# Altium PCB Omid Mazarei.PcbDoc (part 2 of 3)
Units mm, origin at the board's own origin, x right, y up, seen from the top; angles counter-clockwise.
Board outline 297 x 210 mm, 2 copper layers (Top Layer, Bottom Layer); 469 components, 0 nets, 938 pads, 2 vias.
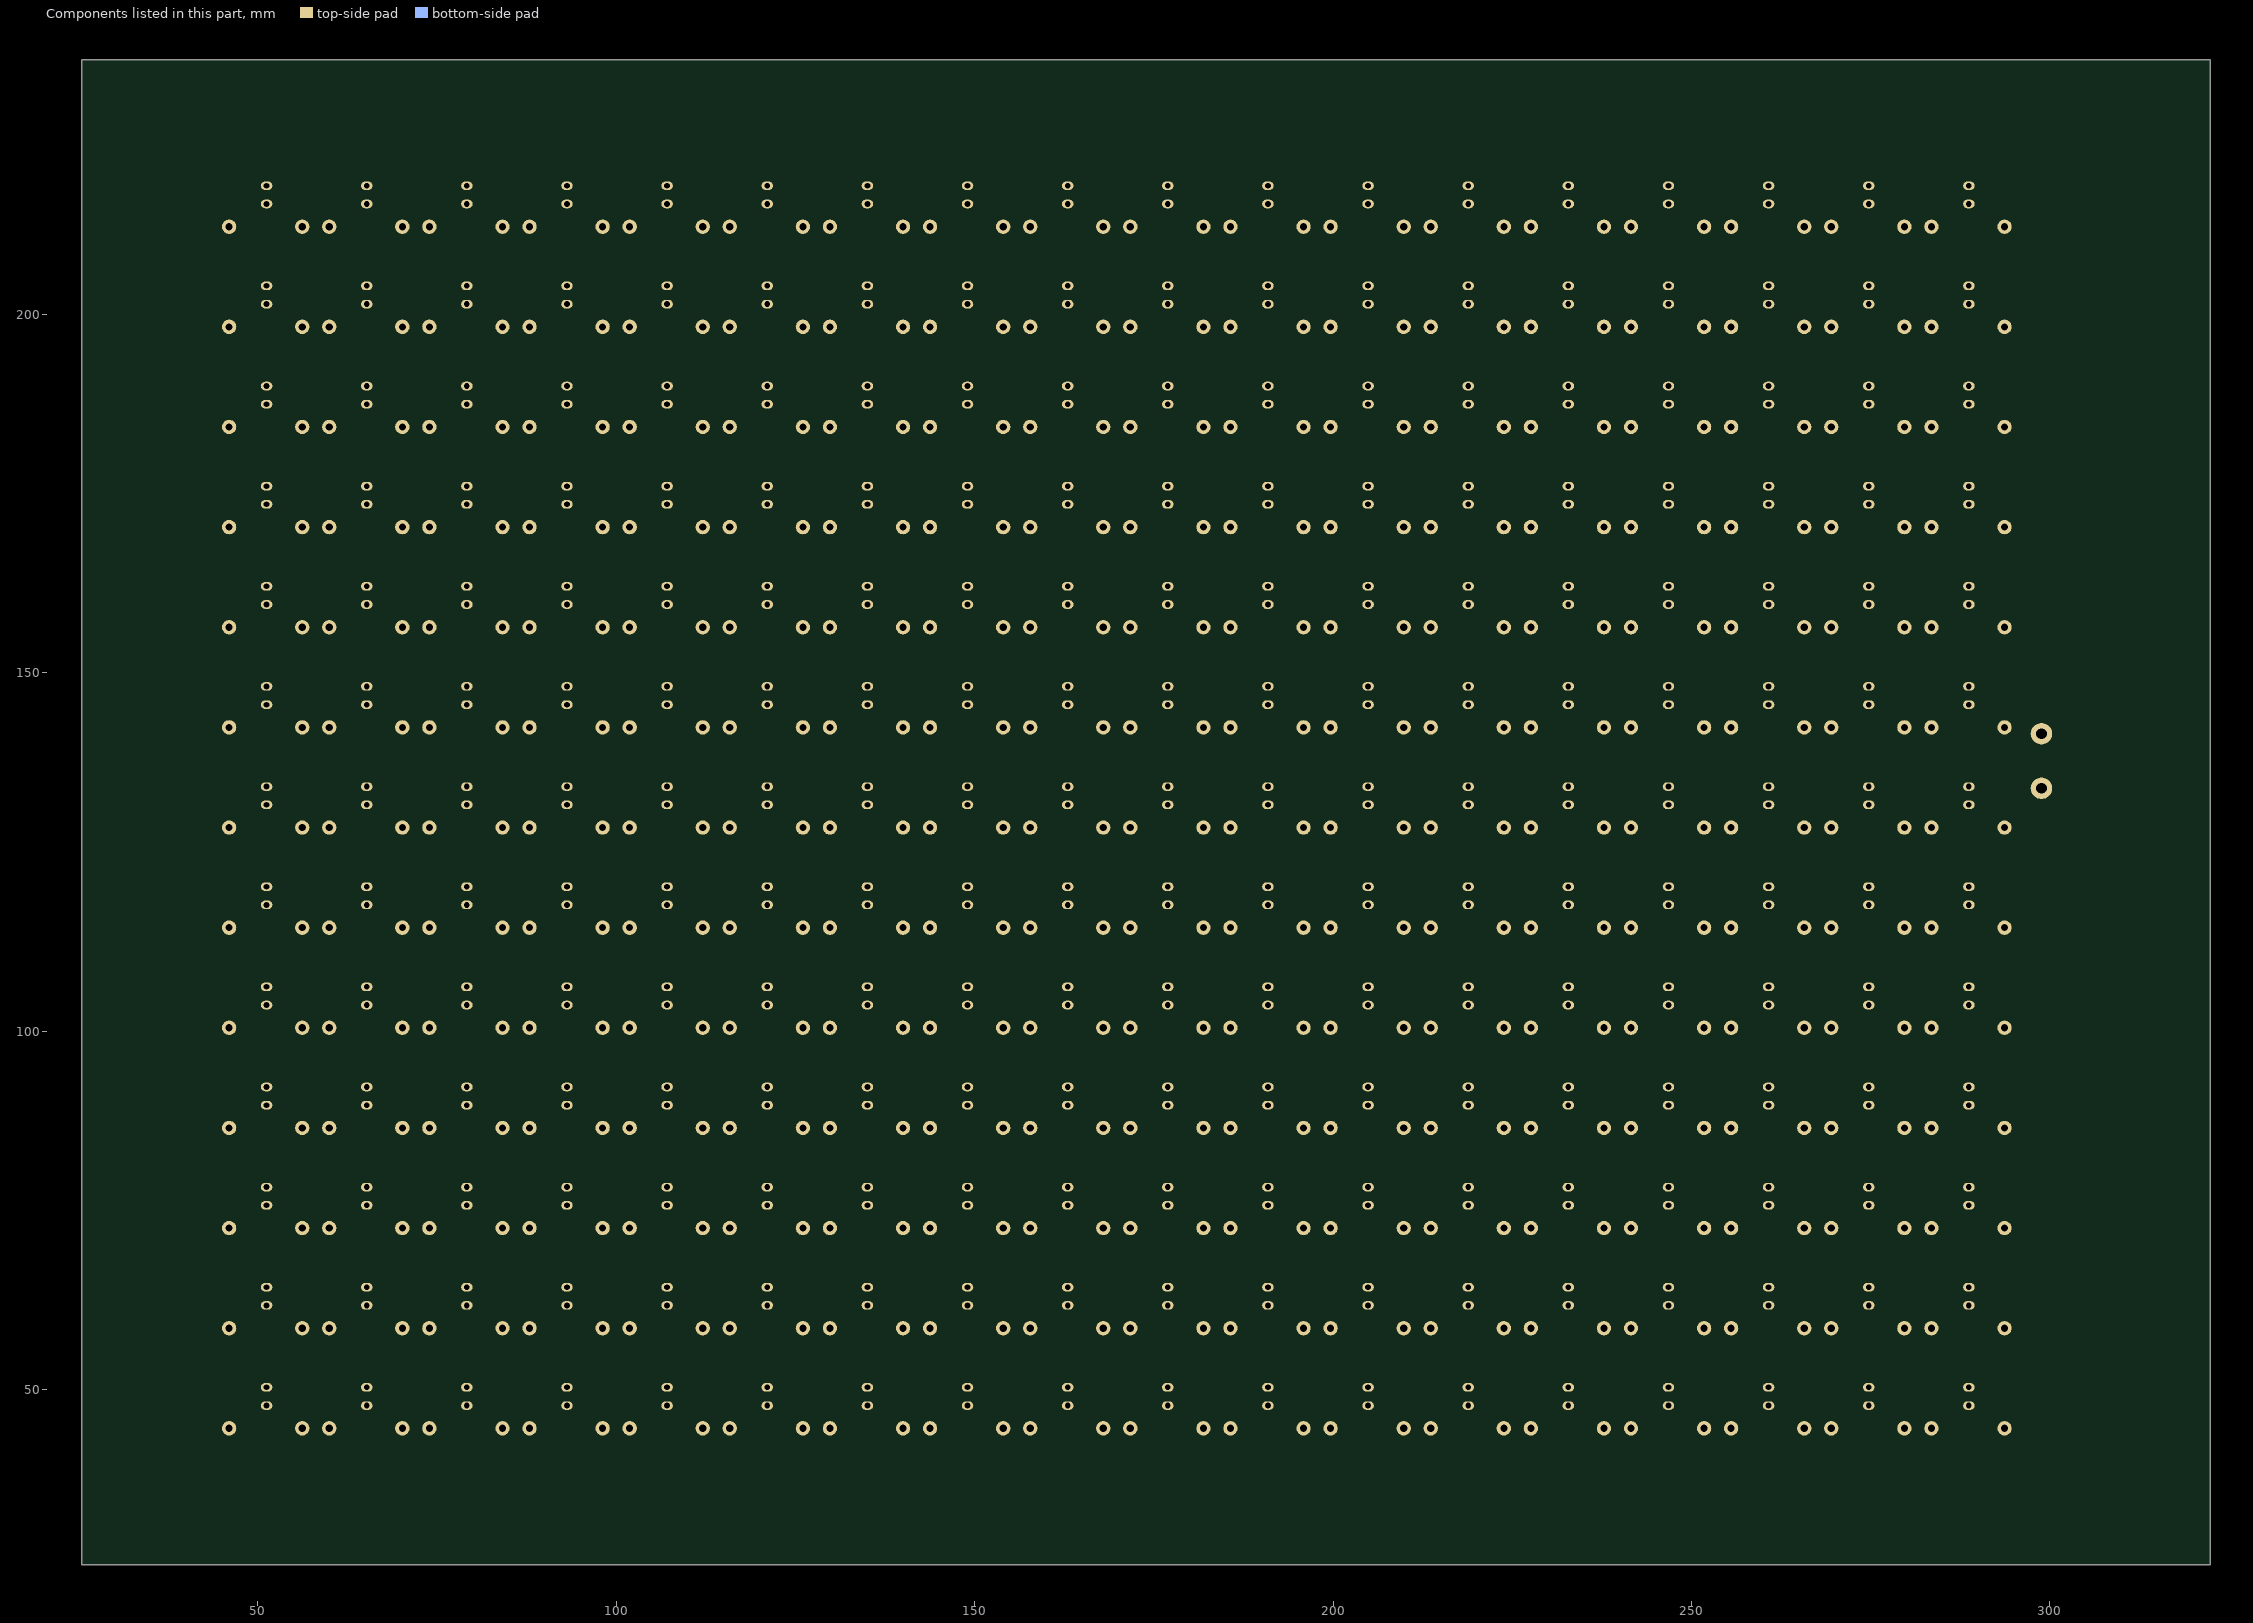
[diagram p2: the components of this part, seen from the top]

## Via types
v1: diameter 2, hole 1, Top Layer to Bottom Layer, 2 vias

## Nets (pads, with @x,y where several pads share a name; then routed paths per layer and width w, separated by ;. In a path a pad name is that pad's centre, name@x,y a point inside that pad or via, vN(x,y) a via of type N, cw(c..) or ccw(c..) an arc to the next point about the centre after c; other vN are vias at no path point)
pads on no net: Designator11_1_2.1 Designator11_1_2.2 Designator11_1_3.1 Designator11_1_3.2 Designator11_1_4.1 Designator11_1_4.2 Designator11_1_5.1 Designator11_1_5.2 Designator11_1_6.1 Designator11_1_6.2 Designator11_1_7.1 Designator11_1_7.2 Designator11_1_8.1 Designator11_1_8.2 Designator11_1_9.1 Designator11_1_9.2 Designator11_1_10.1 Designator11_1_10.2 Designator11_1_11.1 Designator11_1_11.2 Designator11_1_12.1 Designator11_1_12.2 Designator11_1_13.1 Designator11_1_13.2 Designator11_1_14.1 Designator11_1_14.2 Designator11_2_2.1 Designator11_2_2.2 Designator11_2_3.1 Designator11_2_3.2 Designator11_2_4.1 Designator11_2_4.2 Designator11_2_5.1 Designator11_2_5.2 Designator11_2_6.1 Designator11_2_6.2 Designator11_2_7.1 Designator11_2_7.2 Designator11_2_8.1 Designator11_2_8.2 Designator11_2_9.1 Designator11_2_9.2 Designator11_2_10.1 Designator11_2_10.2 Designator11_2_11.1 Designator11_2_11.2 Designator11_2_12.1 Designator11_2_12.2 Designator11_2_13.1 Designator11_2_13.2 Designator11_2_14.1 Designator11_2_14.2 Designator11_3_2.1 Designator11_3_2.2 Designator11_3_3.1 Designator11_3_3.2 Designator11_3_4.1 Designator11_3_4.2 Designator11_3_5.1 Designator11_3_5.2 Designator11_3_6.1 Designator11_3_6.2 Designator11_3_7.1 Designator11_3_7.2 Designator11_3_8.1 Designator11_3_8.2 Designator11_3_9.1 Designator11_3_9.2 Designator11_3_10.1 Designator11_3_10.2 Designator11_3_11.1 Designator11_3_11.2 Designator11_3_12.1 Designator11_3_12.2 Designator11_3_13.1 Designator11_3_13.2 Designator11_3_14.1 Designator11_3_14.2 Designator11_4_2.1 Designator11_4_2.2 Designator11_4_3.1 Designator11_4_3.2 Designator11_4_4.1 Designator11_4_4.2 Designator11_4_5.1 Designator11_4_5.2 Designator11_4_6.1 Designator11_4_6.2 Designator11_4_7.1 Designator11_4_7.2 Designator11_4_8.1 Designator11_4_8.2 Designator11_4_9.1 Designator11_4_9.2 Designator11_4_10.1 Designator11_4_10.2 Designator11_4_11.1 Designator11_4_11.2 Designator11_4_12.1 Designator11_4_12.2 Designator11_4_13.1 Designator11_4_13.2 Designator11_4_14.1 Designator11_4_14.2 Designator11_5_2.1 Designator11_5_2.2 Designator11_5_3.1 Designator11_5_3.2 Designator11_5_4.1 Designator11_5_4.2 Designator11_5_5.1 Designator11_5_5.2 Designator11_5_6.1 Designator11_5_6.2 Designator11_5_7.1 Designator11_5_7.2 Designator11_5_8.1 Designator11_5_8.2 Designator11_5_9.1 Designator11_5_9.2 Designator11_5_10.1 Designator11_5_10.2 Designator11_5_11.1 Designator11_5_11.2 Designator11_5_12.1 Designator11_5_12.2 Designator11_5_13.1 Designator11_5_13.2 Designator11_5_14.1 Designator11_5_14.2 Designator11_6_2.1 Designator11_6_2.2 Designator11_6_3.1 Designator11_6_3.2 Designator11_6_4.1 Designator11_6_4.2 Designator11_6_5.1 Designator11_6_5.2 Designator11_6_6.1 Designator11_6_6.2 Designator11_6_7.1 Designator11_6_7.2 Designator11_6_8.1 Designator11_6_8.2 Designator11_6_9.1 Designator11_6_9.2 Designator11_6_10.1 Designator11_6_10.2 Designator11_6_11.1 Designator11_6_11.2 Designator11_6_12.1 Designator11_6_12.2 Designator11_6_13.1 Designator11_6_13.2 Designator11_6_14.1 Designator11_6_14.2 Designator11_7_2.1 Designator11_7_2.2 Designator11_7_3.1 Designator11_7_3.2 Designator11_7_4.1 Designator11_7_4.2 Designator11_7_5.1 Designator11_7_5.2 Designator11_7_6.1 Designator11_7_6.2 Designator11_7_7.1 Designator11_7_7.2 Designator11_7_8.1 Designator11_7_8.2 Designator11_7_9.1 Designator11_7_9.2 Designator11_7_10.1 Designator11_7_10.2 Designator11_7_11.1 Designator11_7_11.2 Designator11_7_12.1 Designator11_7_12.2 Designator11_7_13.1 Designator11_7_13.2 Designator11_7_14.1 Designator11_7_14.2 Designator11_8_2.1 Designator11_8_2.2 Designator11_8_3.1 Designator11_8_3.2 Designator11_8_4.1 Designator11_8_4.2 Designator11_8_5.1 Designator11_8_5.2 Designator11_8_6.1 Designator11_8_6.2 Designator11_8_7.1 Designator11_8_7.2 Designator11_8_8.1 Designator11_8_8.2 Designator11_8_9.1 Designator11_8_9.2 Designator11_8_10.1 Designator11_8_10.2 Designator11_8_11.1 Designator11_8_11.2 Designator11_8_12.1 Designator11_8_12.2 Designator11_8_13.1 Designator11_8_13.2 Designator11_8_14.1 Designator11_8_14.2 Designator11_9_2.1 Designator11_9_2.2 Designator11_9_3.1 Designator11_9_3.2 Designator11_9_4.1 Designator11_9_4.2 Designator11_9_5.1 Designator11_9_5.2 Designator11_9_6.1 Designator11_9_6.2 Designator11_9_7.1 Designator11_9_7.2 Designator11_9_8.1 Designator11_9_8.2 Designator11_9_9.1 Designator11_9_9.2 Designator11_9_10.1 Designator11_9_10.2 Designator11_9_11.1 Designator11_9_11.2 Designator11_9_12.1 Designator11_9_12.2 Designator11_9_13.1 Designator11_9_13.2 Designator11_9_14.1 Designator11_9_14.2 Designator11_10_2.1 Designator11_10_2.2 Designator11_10_3.1 Designator11_10_3.2 Designator11_10_4.1 Designator11_10_4.2 Designator11_10_5.1 Designator11_10_5.2 Designator11_10_6.1 Designator11_10_6.2 Designator11_10_7.1 Designator11_10_7.2 Designator11_10_8.1 Designator11_10_8.2 Designator11_10_9.1 Designator11_10_9.2 Designator11_10_10.1 Designator11_10_10.2 Designator11_10_11.1 Designator11_10_11.2 Designator11_10_12.1 Designator11_10_12.2 Designator11_10_13.1 Designator11_10_13.2 Designator11_10_14.1 Designator11_10_14.2 Designator11_11_2.1 Designator11_11_2.2 Designator11_11_3.1 Designator11_11_3.2 Designator11_11_4.1 Designator11_11_4.2 Designator11_11_5.1 Designator11_11_5.2 Designator11_11_6.1 Designator11_11_6.2 Designator11_11_7.1 Designator11_11_7.2 Designator11_11_8.1 Designator11_11_8.2 Designator11_11_9.1 Designator11_11_9.2 Designator11_11_10.1 Designator11_11_10.2 Designator11_11_11.1 Designator11_11_11.2 Designator11_11_12.1 Designator11_11_12.2 Designator11_11_13.1 Designator11_11_13.2 Designator11_11_14.1 Designator11_11_14.2 Designator11_12_2.1 Designator11_12_2.2 Designator11_12_3.1 Designator11_12_3.2 Designator11_12_4.1 Designator11_12_4.2 Designator11_12_5.1 Designator11_12_5.2 Designator11_12_6.1 Designator11_12_6.2 Designator11_12_7.1 Designator11_12_7.2 Designator11_12_8.1 Designator11_12_8.2 Designator11_12_9.1 Designator11_12_9.2 Designator11_12_10.1 Designator11_12_10.2 Designator11_12_11.1 Designator11_12_11.2 Designator11_12_12.1 Designator11_12_12.2 Designator11_12_13.1 Designator11_12_13.2 Designator11_12_14.1 Designator11_12_14.2 Designator11_13_2.1 Designator11_13_2.2 Designator11_13_3.1 Designator11_13_3.2 Designator11_13_4.1 Designator11_13_4.2 Designator11_13_5.1 Designator11_13_5.2 Designator11_13_6.1 Designator11_13_6.2 Designator11_13_7.1 Designator11_13_7.2 Designator11_13_8.1 Designator11_13_8.2 Designator11_13_9.1 Designator11_13_9.2 Designator11_13_10.1 Designator11_13_10.2 Designator11_13_11.1 Designator11_13_11.2 Designator11_13_12.1 Designator11_13_12.2 Designator11_13_13.1 Designator11_13_13.2 Designator11_13_14.1 Designator11_13_14.2 Designator11_14_2.1 Designator11_14_2.2 Designator11_14_3.1 Designator11_14_3.2 Designator11_14_4.1 Designator11_14_4.2 Designator11_14_5.1 Designator11_14_5.2 Designator11_14_6.1 Designator11_14_6.2 Designator11_14_7.1 Designator11_14_7.2 Designator11_14_8.1 Designator11_14_8.2 Designator11_14_9.1 Designator11_14_9.2 Designator11_14_10.1 Designator11_14_10.2 Designator11_14_11.1 Designator11_14_11.2 Designator11_14_12.1 Designator11_14_12.2 Designator11_14_13.1 Designator11_14_13.2 Designator11_14_14.1 Designator11_14_14.2 Designator11_15_2.1 Designator11_15_2.2 Designator11_15_3.1 Designator11_15_3.2 Designator11_15_4.1 Designator11_15_4.2 Designator11_15_5.1 Designator11_15_5.2 Designator11_15_6.1 Designator11_15_6.2 Designator11_15_7.1 Designator11_15_7.2 Designator11_15_8.1 Designator11_15_8.2 Designator11_15_9.1 Designator11_15_9.2 Designator11_15_10.1 Designator11_15_10.2 Designator11_15_11.1 Designator11_15_11.2 Designator11_15_12.1 Designator11_15_12.2 Designator11_15_13.1 Designator11_15_13.2 Designator11_15_14.1 Designator11_15_14.2 Designator11_16_2.1 Designator11_16_2.2 Designator11_16_3.1 Designator11_16_3.2 Designator11_16_4.1 Designator11_16_4.2 Designator11_16_5.1 Designator11_16_5.2 Designator11_16_6.1 Designator11_16_6.2 Designator11_16_7.1 Designator11_16_7.2 Designator11_16_8.1 Designator11_16_8.2 Designator11_16_9.1 Designator11_16_9.2 Designator11_16_10.1 Designator11_16_10.2 Designator11_16_11.1 Designator11_16_11.2 Designator11_16_12.1 Designator11_16_12.2 Designator11_16_13.1 Designator11_16_13.2 Designator11_16_14.1 Designator11_16_14.2 Designator11_17_2.1 Designator11_17_2.2 Designator11_17_3.1 Designator11_17_3.2 Designator11_17_4.1 Designator11_17_4.2 Designator11_17_5.1 Designator11_17_5.2 Designator11_17_6.1 Designator11_17_6.2 Designator11_17_7.1 Designator11_17_7.2 Designator11_17_8.1 Designator11_17_8.2 Designator11_17_9.1 Designator11_17_9.2 Designator11_17_10.1 Designator11_17_10.2 Designator11_17_11.1 Designator11_17_11.2 Designator11_17_12.1 Designator11_17_12.2 Designator11_17_13.1 Designator11_17_13.2 Designator11_17_14.1 Designator11_17_14.2 Designator11_18_2.1 Designator11_18_2.2 Designator11_18_3.1 Designator11_18_3.2 Designator11_18_4.1 Designator11_18_4.2 Designator11_18_5.1 Designator11_18_5.2 Designator11_18_6.1 Designator11_18_6.2 Designator11_18_7.1 Designator11_18_7.2 Designator11_18_8.1 Designator11_18_8.2 Designator11_18_9.1 Designator11_18_9.2 Designator11_18_10.1 Designator11_18_10.2 Designator11_18_11.1 Designator11_18_11.2 Designator11_18_12.1 Designator11_18_12.2 Designator11_18_13.1 Designator11_18_13.2 Designator11_18_14.1 Designator11_18_14.2 Designator12_1_2.1 Designator12_1_2.2 Designator12_1_3.1 Designator12_1_3.2 Designator12_1_4.1 Designator12_1_4.2 Designator12_1_5.1 Designator12_1_5.2 Designator12_1_6.1 Designator12_1_6.2 Designator12_1_7.1 Designator12_1_7.2 Designator12_1_8.1 Designator12_1_8.2 Designator12_1_9.1 Designator12_1_9.2 Designator12_1_10.1 Designator12_1_10.2 Designator12_1_11.1 Designator12_1_11.2 Designator12_1_12.1 Designator12_1_12.2 Designator12_1_13.1 Designator12_1_13.2 Designator12_1_14.1 Designator12_1_14.2 Designator12_2_2.1 Designator12_2_2.2 Designator12_2_3.1 Designator12_2_3.2 Designator12_2_4.1 Designator12_2_4.2 Designator12_2_5.1 Designator12_2_5.2 Designator12_2_6.1 Designator12_2_6.2 Designator12_2_7.1 Designator12_2_7.2 Designator12_2_8.1 Designator12_2_8.2 Designator12_2_9.1 Designator12_2_9.2 Designator12_2_10.1 Designator12_2_10.2 Designator12_2_11.1 Designator12_2_11.2 Designator12_2_12.1 Designator12_2_12.2 Designator12_2_13.1 Designator12_2_13.2 Designator12_2_14.1 Designator12_2_14.2 Designator12_3_2.1 Designator12_3_2.2 Designator12_3_3.1 Designator12_3_3.2 Designator12_3_4.1 Designator12_3_4.2 Designator12_3_5.1 Designator12_3_5.2 Designator12_3_6.1 Designator12_3_6.2 Designator12_3_7.1 Designator12_3_7.2 Designator12_3_8.1 Designator12_3_8.2 Designator12_3_9.1 Designator12_3_9.2 Designator12_3_10.1 Designator12_3_10.2 Designator12_3_11.1 Designator12_3_11.2 Designator12_3_12.1 Designator12_3_12.2 Designator12_3_13.1 Designator12_3_13.2 Designator12_3_14.1 Designator12_3_14.2 Designator12_4_2.1 Designator12_4_2.2 Designator12_4_3.1 Designator12_4_3.2 Designator12_4_4.1 Designator12_4_4.2 Designator12_4_5.1 Designator12_4_5.2 Designator12_4_6.1 Designator12_4_6.2 Designator12_4_7.1 Designator12_4_7.2 Designator12_4_8.1 Designator12_4_8.2 Designator12_4_9.1 Designator12_4_9.2 Designator12_4_10.1 Designator12_4_10.2 Designator12_4_11.1 Designator12_4_11.2 Designator12_4_12.1 Designator12_4_12.2 Designator12_4_13.1 Designator12_4_13.2 Designator12_4_14.1 Designator12_4_14.2 Designator12_5_2.1 Designator12_5_2.2 Designator12_5_3.1 Designator12_5_3.2 Designator12_5_4.1 Designator12_5_4.2 Designator12_5_5.1 Designator12_5_5.2 Designator12_5_6.1 Designator12_5_6.2 Designator12_5_7.1 Designator12_5_7.2 Designator12_5_8.1 Designator12_5_8.2 Designator12_5_9.1 Designator12_5_9.2 Designator12_5_10.1 Designator12_5_10.2 Designator12_5_11.1 Designator12_5_11.2 Designator12_5_12.1 Designator12_5_12.2 Designator12_5_13.1 Designator12_5_13.2 Designator12_5_14.1 Designator12_5_14.2 Designator12_6_2.1 Designator12_6_2.2 Designator12_6_3.1 Designator12_6_3.2 Designator12_6_4.1 Designator12_6_4.2 Designator12_6_5.1 Designator12_6_5.2 Designator12_6_6.1 Designator12_6_6.2 Designator12_6_7.1 Designator12_6_7.2 Designator12_6_8.1 Designator12_6_8.2 Designator12_6_9.1 Designator12_6_9.2 Designator12_6_10.1 Designator12_6_10.2 Designator12_6_11.1 Designator12_6_11.2 Designator12_6_12.1 Designator12_6_12.2 Designator12_6_13.1 Designator12_6_13.2 Designator12_6_14.1 Designator12_6_14.2 Designator12_7_2.1 Designator12_7_2.2 Designator12_7_3.1 Designator12_7_3.2 Designator12_7_4.1 Designator12_7_4.2 Designator12_7_5.1 Designator12_7_5.2 Designator12_7_6.1 Designator12_7_6.2 Designator12_7_7.1 Designator12_7_7.2 Designator12_7_8.1 Designator12_7_8.2 Designator12_7_9.1 Designator12_7_9.2 Designator12_7_10.1 Designator12_7_10.2 Designator12_7_11.1 Designator12_7_11.2 Designator12_7_12.1 Designator12_7_12.2 Designator12_7_13.1 Designator12_7_13.2 Designator12_7_14.1 Designator12_7_14.2 Designator12_8_2.1 Designator12_8_2.2 Designator12_8_3.1 Designator12_8_3.2 Designator12_8_4.1 Designator12_8_4.2 Designator12_8_5.1 Designator12_8_5.2 Designator12_8_6.1 Designator12_8_6.2 Designator12_8_7.1 Designator12_8_7.2 Designator12_8_8.1 Designator12_8_8.2 Designator12_8_9.1 Designator12_8_9.2 Designator12_8_10.1 Designator12_8_10.2 Designator12_8_11.1 Designator12_8_11.2 Designator12_8_12.1 Designator12_8_12.2 Designator12_8_13.1 Designator12_8_13.2 Designator12_8_14.1 Designator12_8_14.2 Designator12_9_2.1 Designator12_9_2.2 Designator12_9_3.1 Designator12_9_3.2 Designator12_9_4.1 Designator12_9_4.2 Designator12_9_5.1 Designator12_9_5.2 Designator12_9_6.1 Designator12_9_6.2 Designator12_9_7.1 Designator12_9_7.2 Designator12_9_8.1 Designator12_9_8.2 Designator12_9_9.1 Designator12_9_9.2 Designator12_9_10.1 Designator12_9_10.2 Designator12_9_11.1 Designator12_9_11.2 Designator12_9_12.1 Designator12_9_12.2 Designator12_9_13.1 Designator12_9_13.2 Designator12_9_14.1 Designator12_9_14.2 Designator12_10_2.1 Designator12_10_2.2 Designator12_10_3.1 Designator12_10_3.2 Designator12_10_4.1 Designator12_10_4.2 Designator12_10_5.1 Designator12_10_5.2 Designator12_10_6.1 Designator12_10_6.2 Designator12_10_7.1 Designator12_10_7.2 Designator12_10_8.1 Designator12_10_8.2 Designator12_10_9.1 Designator12_10_9.2 Designator12_10_10.1 Designator12_10_10.2 Designator12_10_11.1 Designator12_10_11.2 Designator12_10_12.1 Designator12_10_12.2 Designator12_10_13.1 Designator12_10_13.2 Designator12_10_14.1 Designator12_10_14.2 Designator12_11_2.1 Designator12_11_2.2 Designator12_11_3.1 Designator12_11_3.2 Designator12_11_4.1 Designator12_11_4.2 Designator12_11_5.1 Designator12_11_5.2 Designator12_11_6.1 Designator12_11_6.2 Designator12_11_7.1 Designator12_11_7.2 Designator12_11_8.1 Designator12_11_8.2 Designator12_11_9.1 Designator12_11_9.2 Designator12_11_10.1 Designator12_11_10.2 Designator12_11_11.1 Designator12_11_11.2 Designator12_11_12.1 Designator12_11_12.2 Designator12_11_13.1 Designator12_11_13.2 Designator12_11_14.1 Designator12_11_14.2 Designator12_12_2.1 Designator12_12_2.2 Designator12_12_3.1 Designator12_12_3.2 Designator12_12_4.1 Designator12_12_4.2 Designator12_12_5.1 Designator12_12_5.2 Designator12_12_6.1 Designator12_12_6.2 Designator12_12_7.1 Designator12_12_7.2 Designator12_12_8.1 Designator12_12_8.2 Designator12_12_9.1 Designator12_12_9.2 Designator12_12_10.1 Designator12_12_10.2 Designator12_12_11.1 Designator12_12_11.2 Designator12_12_12.1 Designator12_12_12.2 Designator12_12_13.1 Designator12_12_13.2 Designator12_12_14.1 Designator12_12_14.2 Designator12_13_2.1 Designator12_13_2.2 Designator12_13_3.1 Designator12_13_3.2 Designator12_13_4.1 Designator12_13_4.2 Designator12_13_5.1 Designator12_13_5.2 Designator12_13_6.1 Designator12_13_6.2 Designator12_13_7.1 Designator12_13_7.2 Designator12_13_8.1 Designator12_13_8.2 Designator12_13_9.1 Designator12_13_9.2 Designator12_13_10.1 Designator12_13_10.2 Designator12_13_11.1 Designator12_13_11.2 Designator12_13_12.1 Designator12_13_12.2 Designator12_13_13.1 Designator12_13_13.2 Designator12_13_14.1 Designator12_13_14.2 Designator12_14_2.1 Designator12_14_2.2 Designator12_14_3.1 Designator12_14_3.2 Designator12_14_4.1 Designator12_14_4.2 Designator12_14_5.1 Designator12_14_5.2 Designator12_14_6.1 Designator12_14_6.2 Designator12_14_7.1 Designator12_14_7.2 Designator12_14_8.1 Designator12_14_8.2 Designator12_14_9.1 Designator12_14_9.2 Designator12_14_10.1 Designator12_14_10.2 Designator12_14_11.1 Designator12_14_11.2 Designator12_14_12.1 Designator12_14_12.2 Designator12_14_13.1 Designator12_14_13.2 Designator12_14_14.1 Designator12_14_14.2 Designator12_15_2.1 Designator12_15_2.2 Designator12_15_3.1 Designator12_15_3.2 Designator12_15_4.1 Designator12_15_4.2 Designator12_15_5.1 Designator12_15_5.2 Designator12_15_6.1 Designator12_15_6.2 Designator12_15_7.1 Designator12_15_7.2 Designator12_15_8.1 Designator12_15_8.2 Designator12_15_9.1 Designator12_15_9.2 Designator12_15_10.1 Designator12_15_10.2 Designator12_15_11.1 Designator12_15_11.2 Designator12_15_12.1 Designator12_15_12.2 Designator12_15_13.1 Designator12_15_13.2 Designator12_15_14.1 Designator12_15_14.2 Designator12_16_2.1 Designator12_16_2.2 Designator12_16_3.1 Designator12_16_3.2 Designator12_16_4.1 Designator12_16_4.2 Designator12_16_5.1 Designator12_16_5.2 Designator12_16_6.1 Designator12_16_6.2 Designator12_16_7.1 Designator12_16_7.2 Designator12_16_8.1 Designator12_16_8.2 Designator12_16_9.1 Designator12_16_9.2 Designator12_16_10.1 Designator12_16_10.2 Designator12_16_11.1 Designator12_16_11.2 Designator12_16_12.1 Designator12_16_12.2 Designator12_16_13.1 Designator12_16_13.2 Designator12_16_14.1 Designator12_16_14.2 Designator12_17_2.1 Designator12_17_2.2 Designator12_17_3.1 Designator12_17_3.2 Designator12_17_4.1 Designator12_17_4.2 Designator12_17_5.1 Designator12_17_5.2 Designator12_17_6.1 Designator12_17_6.2 Designator12_17_7.1 Designator12_17_7.2 Designator12_17_8.1 Designator12_17_8.2 Designator12_17_9.1 Designator12_17_9.2 Designator12_17_10.1 Designator12_17_10.2 Designator12_17_11.1 Designator12_17_11.2 Designator12_17_12.1 Designator12_17_12.2 Designator12_17_13.1 Designator12_17_13.2 Designator12_17_14.1 Designator12_17_14.2 Designator12_18_2.1 Designator12_18_2.2 Designator12_18_3.1 Designator12_18_3.2 Designator12_18_4.1 Designator12_18_4.2 Designator12_18_5.1 Designator12_18_5.2 Designator12_18_6.1 Designator12_18_6.2 Designator12_18_7.1 Designator12_18_7.2 Designator12_18_8.1 Designator12_18_8.2 Designator12_18_9.1 Designator12_18_9.2 Designator12_18_10.1 Designator12_18_10.2 Designator12_18_11.1 Designator12_18_11.2 Designator12_18_12.1 Designator12_18_12.2 Designator12_18_13.1 Designator12_18_13.2 Designator12_18_14.1 Designator12_18_14.2 Designator13.1 Designator13.2
copper on no net: | length 9480.5